# Altium PCB g1.PcbDoc (part 2 of 2)
Units mm, origin at the board's own origin, x right, y up, seen from the top; angles counter-clockwise.
Board outline 80 x 50 mm, 4 copper layers (Top Layer, Int1 (GND), Int2 (GND), Bottom Layer), stack 1.57 mm thick; 65 components, 42 nets, 263 pads, 236 vias.
Unrouted connection lines stored in the file: 74.
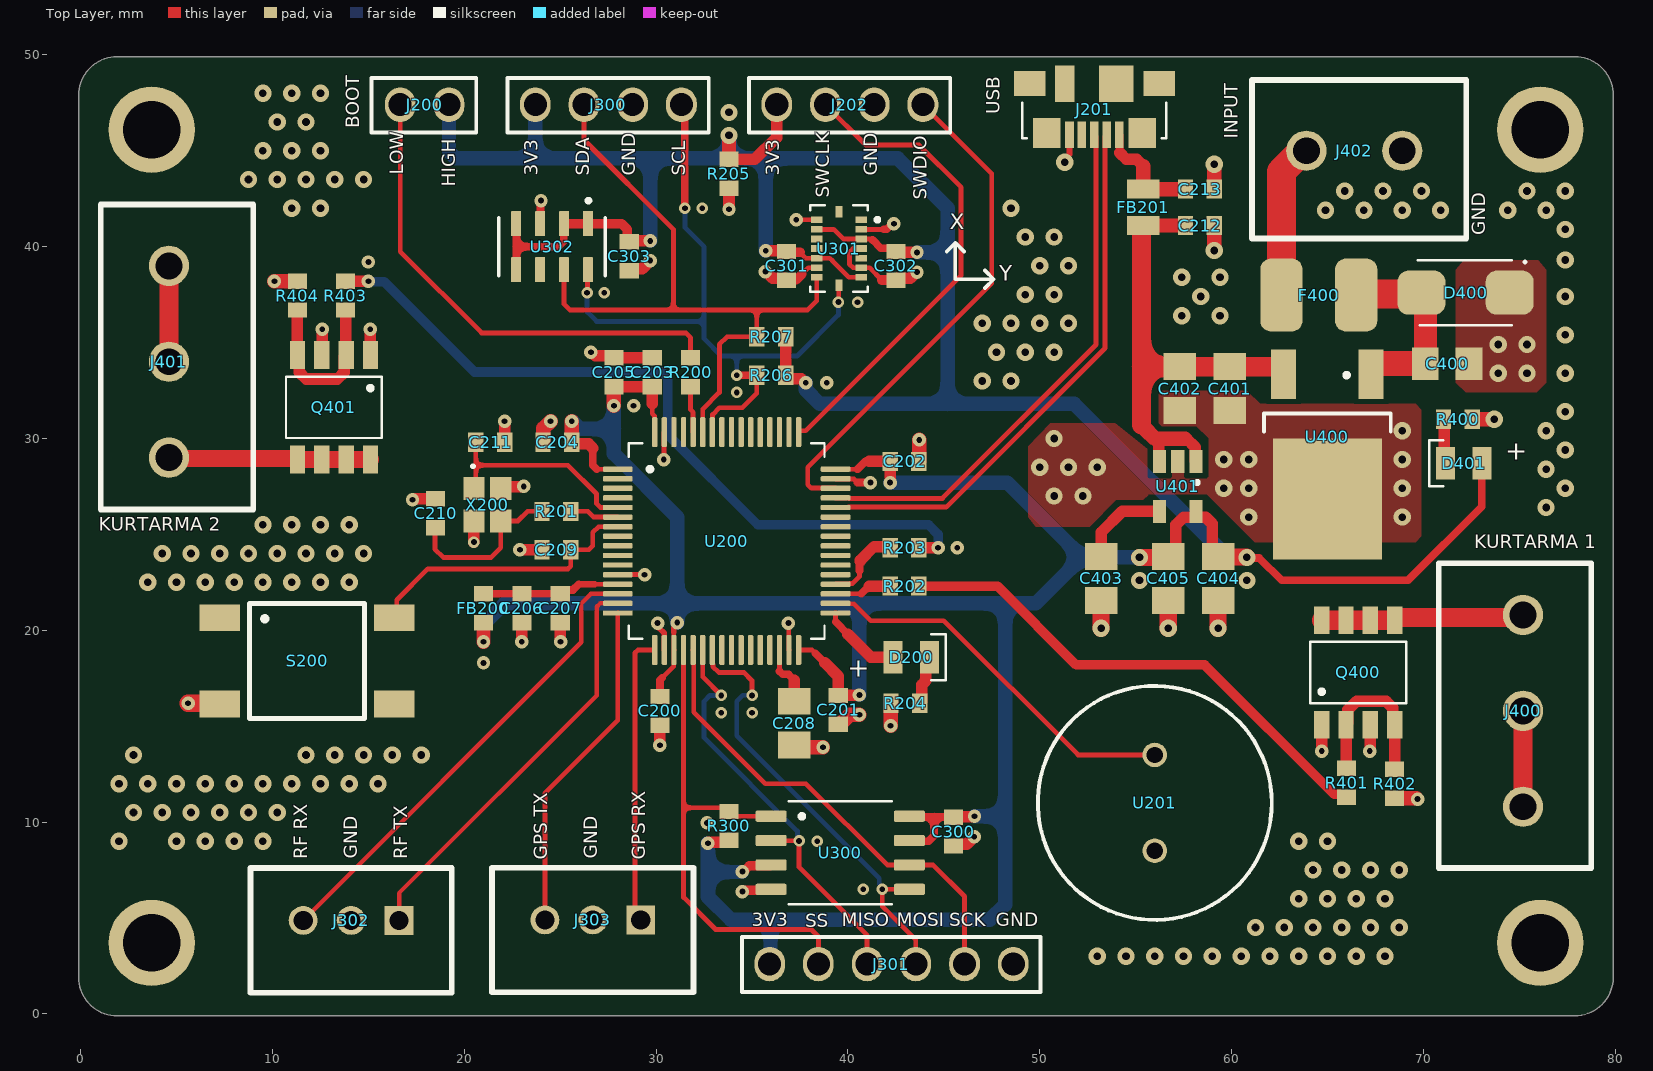
[diagram p0: Top Layer view]

## Via types
v1: diameter 0.9, hole 0.4, Top Layer to Bottom Layer, tented both sides, 160 vias
v2: diameter 0.7, hole 0.3, Top Layer to Bottom Layer, tented both sides, 55 vias
v3: diameter 0.6, hole 0.3, Top Layer to Bottom Layer, tented both sides, 17 vias
v4: diameter 0.9, hole 0.4, Top Layer to Bottom Layer, 4 vias

## Nets (pads, with @x,y where several pads share a name; then routed paths per layer and width w, separated by ;. In a path a pad name is that pad's centre, name@x,y a point inside that pad or via, vN(x,y) a via of type N, cw(c..) or ccw(c..) an arc to the next point about the centre after c; other vN are vias at no path point) (continued)
USART2-TX: J303.3 U200.16 | length 17.6
  Top Layer w0.25: J303.3 24.2,11.5 28,15.3 U200.16
USB_D_N: J201.2 U200.44 | length 28.7
  Top Layer w0.26: U200.44 39.37,26.41 40.03,26.41 40.038,26.418 45.118,26.418 53.407,34.707 53.407,45.747 J201.2
USB_D_P: J201.3 U200.45 | length 27.9
  Top Layer w0.26: U200.45 39.37,26.89 40.03,26.89 40.038,26.882 44.926,26.882 52.943,34.899 52.943,45.747 J201.3
VCAP1: C208.2 U200.30 | length 3.2
  Top Layer w0.25: 36.43,17.87 U200.30
  Top Layer w0.4: 36.43,17.87 36.6,17.7 36.9,17.7 37.2,17.4
  Top Layer w0.6: C208.2 37.2,17.4
VDDA: C206.2 C207.2 FB200.2 U200.13 | length 7.2
  Top Layer w0.25: 26.8,22.4 U200.13
  Top Layer w0.35: 25.964,22.4 26.8,22.4
  Top Layer w0.4: FB200.2 C206.2 C207.2 25.2,22.1 25.664,22.1 25.964,22.4
pads on no net: J201.4 J201.S1 J201.S2 J201.S3 J201.S4 J201.S5 J201.S6 S200.1 S200.4 U200.2 U200.3 U200.4 U200.8 U200.9 U200.10 U200.11 U200.24 U200.25 U200.26 U200.27 U200.28 U200.29 U200.37 U200.38 U200.39 U200.40 U200.41 U200.42 U200.43 U200.50 U200.51 U200.52 U200.53 U200.54 U200.55 U200.56 U200.57 U200.61 U200.62 U301.1 U301.5 U301.12 U301.13 U301.16 U302.6

## Polygon pours and split planes (outlines as drawn)
GND on Top Layer "GND_L-01_P-001" (solid, pour order 0): 56.2,32.3 56.2,30.8 56.364,30.636 58.164,30.636 58.8,30 58.8,28 58.7,27.9 57.6,27.9 57.5,28 57.5,29.4 56.9,29.4 56.9,28 56.8,27.9 55.7,27.9 55.6,28 55.6,29.455 53.932,30.8 50.537,30.8 49.4,29.591 49.4,25.9 49.8,25.4 52.6,25.4 54,26.8 55.4,26.8 55.5,26.9 55.6,27 55.7,27.1 58.7,27.1 61.2,24.6 69.6,24.6 69.9,24.9 69.9,31.5 69.6,31.8 61.5,31.8 60.8,32.5 56.4,32.5
GND on Top Layer "GND_L-01_P-001" (solid, pour order 2): 76.4,38.8 75.983,39.3 72.1,39.3 71.7,38.8 71.7,32.9 72.2,32.4 75.9,32.4 76.4,32.9
GND on Int1 (GND) "GND_L02_P004" (solid, pour order 4): -0.1,1.9 ccw(c1.9,1.9) 1.9,-0.1 77.9,-0.1 ccw(c77.9,1.9) 79.9,1.9 79.9,47.9 ccw(c77.9,47.9) 77.9,49.9 1.9,49.9 ccw(c1.9,47.9) -0.1,47.9
GND on Int2 (GND) "GND_L03_P005" (solid, pour order 5): -0.1,1.9 ccw(c1.9,1.9) 1.9,-0.1 77.9,-0.1 ccw(c77.9,1.9) 79.9,1.9 79.9,47.9 ccw(c77.9,47.9) 77.9,49.9 1.9,49.9 ccw(c1.9,47.9) -0.1,47.9

## Silkscreen, mask and mechanical layers (free items; w line width, h text height)
Top Overlay:
  lines w0.2: 45.15,39.75 45.6,40.2 ; 46.05,39.75 45.6,40.2 ; 47.15,37.85 47.6,38.3 ; 47.15,38.75 47.6,38.3 ; 45.6,40.2 45.6,38.3 47.6,38.3
  text "USB" at 48.155,46.895 h1.2 r90
  text "BOOT" at 14.757,46.176 h1.2 r90
  text "INPUT" at 60.555,45.624 h1.2 r90
  text "LOW" at 17.055,43.737 h1.2 r90
  text "3V3" at 24.055,43.699 h1.2 r90
  text "SDA" at 26.755,43.695 h1.2 r90
  text "GND" at 29.155,43.697 h1.2 r90
  text "SCL" at 31.755,43.695 h1.2 r90
  text "3V3" at 36.655,43.699 h1.2 r90
  text "GND" at 41.755,43.697 h1.2 r90
  text "HIGH" at 19.755,43.123 h1.2 r90
  text "SWCLK" at 39.255,42.552 h1.2 r90
  text "SWDIO" at 44.355,42.453 h1.2 r90
  text "X" at 45.3,40.633 h1.4
  text "GND" at 73.455,40.597 h1.2 r90
  text "Y" at 47.9,37.934 h1.4
  text "KURTARMA 2" at 0.95,24.946 h1.2
  text "KURTARMA 1" at 72.655,24.046 h1.2
  text "GND" at 14.655,8.097 h1.2 r90
  text "GND" at 27.155,8.097 h1.2 r90
  text "RF RX" at 12.057,8.053 h1.2 r90
  text "RF TX" at 17.257,8.053 h1.2 r90
  text "GPS TX" at 24.555,8.034 h1.2 r90
  text "GPS RX" at 29.655,8.034 h1.2 r90
  text "3V3" at 34.999,4.344 h1.2
  text "MISO" at 39.674,4.346 h1.2
  text "MOSI" at 42.545,4.346 h1.2
  text "SCK" at 45.294,4.344 h1.2
  text "GND" at 47.697,4.344 h1.2
  text "SS" at 37.777,4.285 h1.2
Mechanical 1:
  the board outline again, w0.127

## Dimensions
79.9,-0.1 to 79.9,49.9 on Drill Drawing
-0.1,-0.1 to 79.9,-0.1 on Drill Drawing

## Text inside footprints (layer, text, board x,y; h text height)
D200: Top Overlay "+" at 41.133,18.4 h1 r180
D401: Top Overlay "+" at 74.267,28.9 h1